# EAGLE board project_pcb (EAGLE 8.7.1)
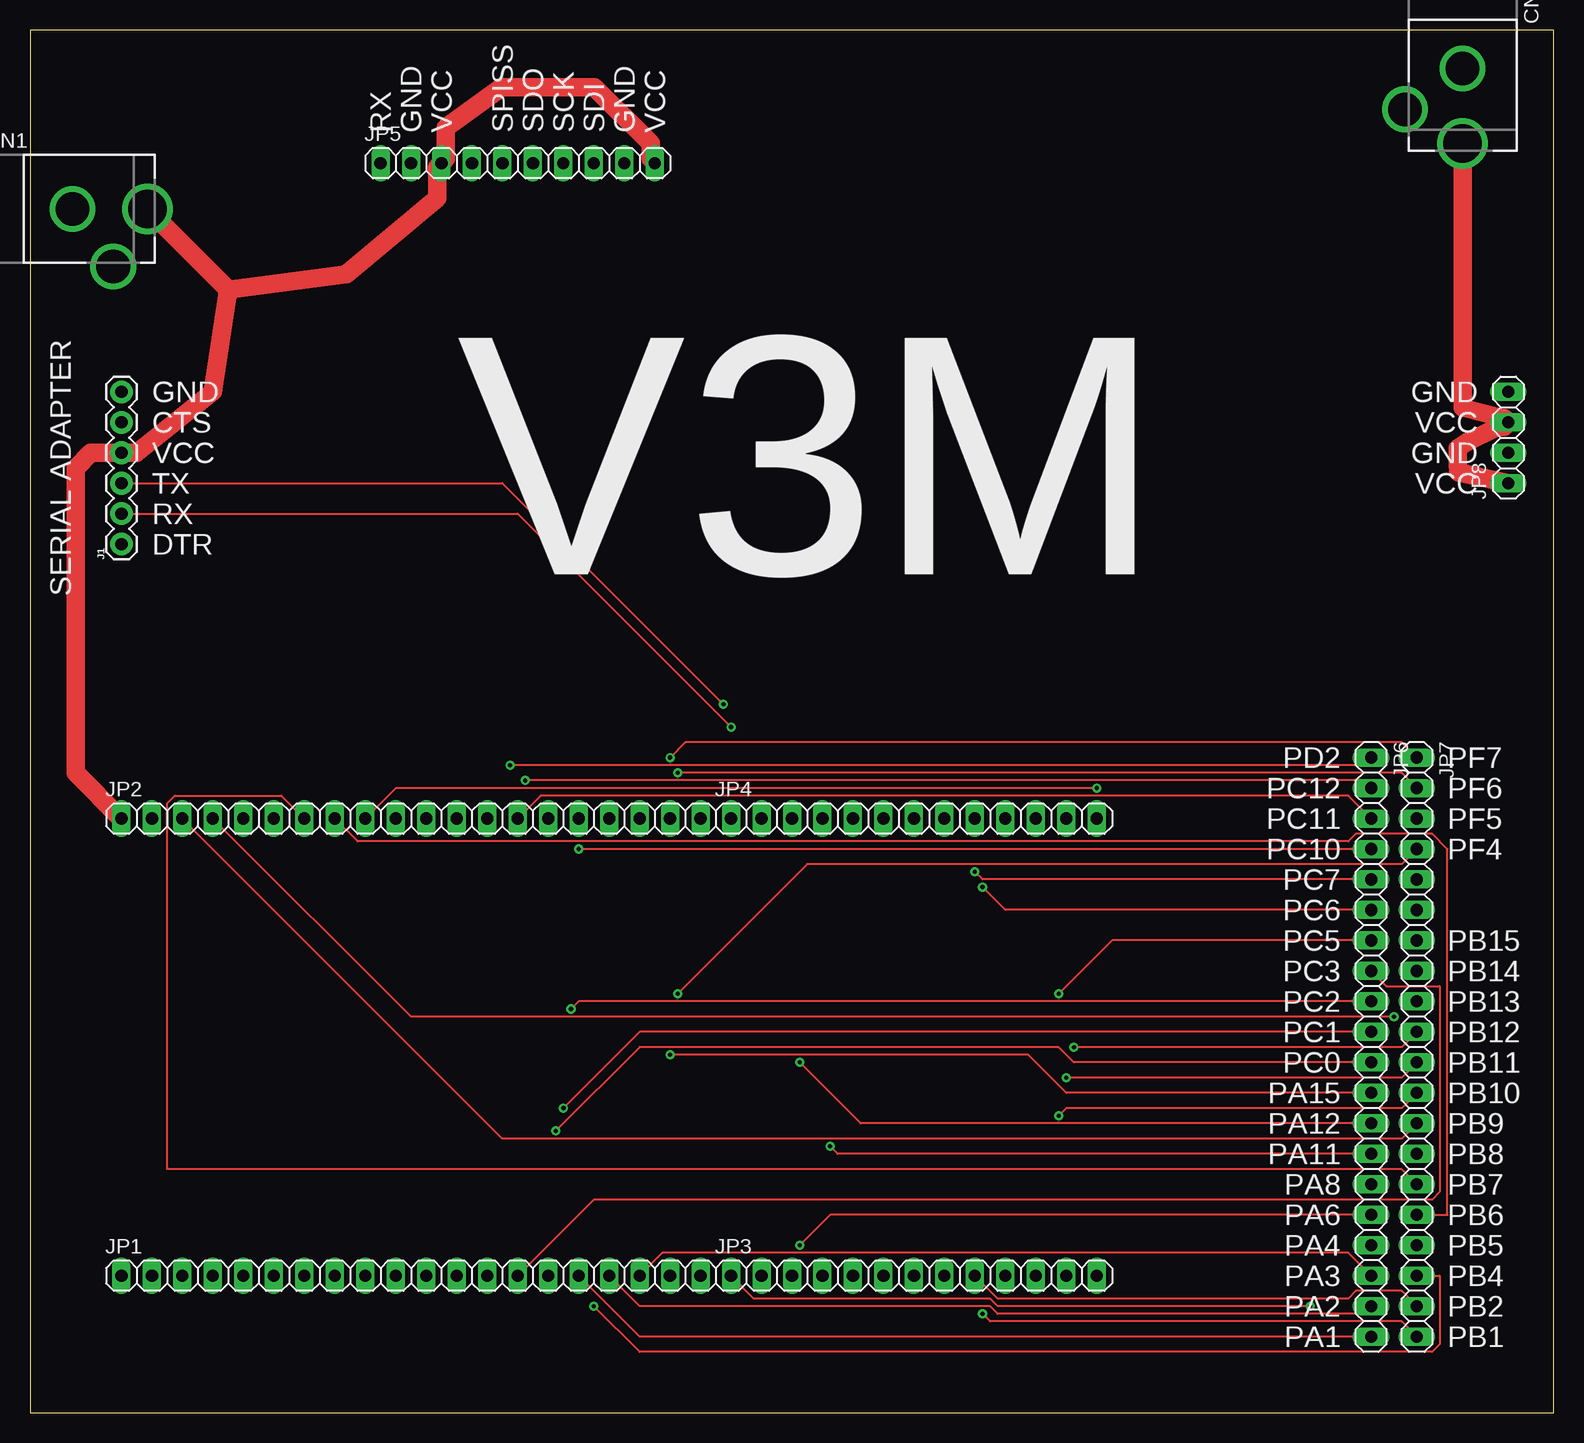
[diagram p0: board, top side]
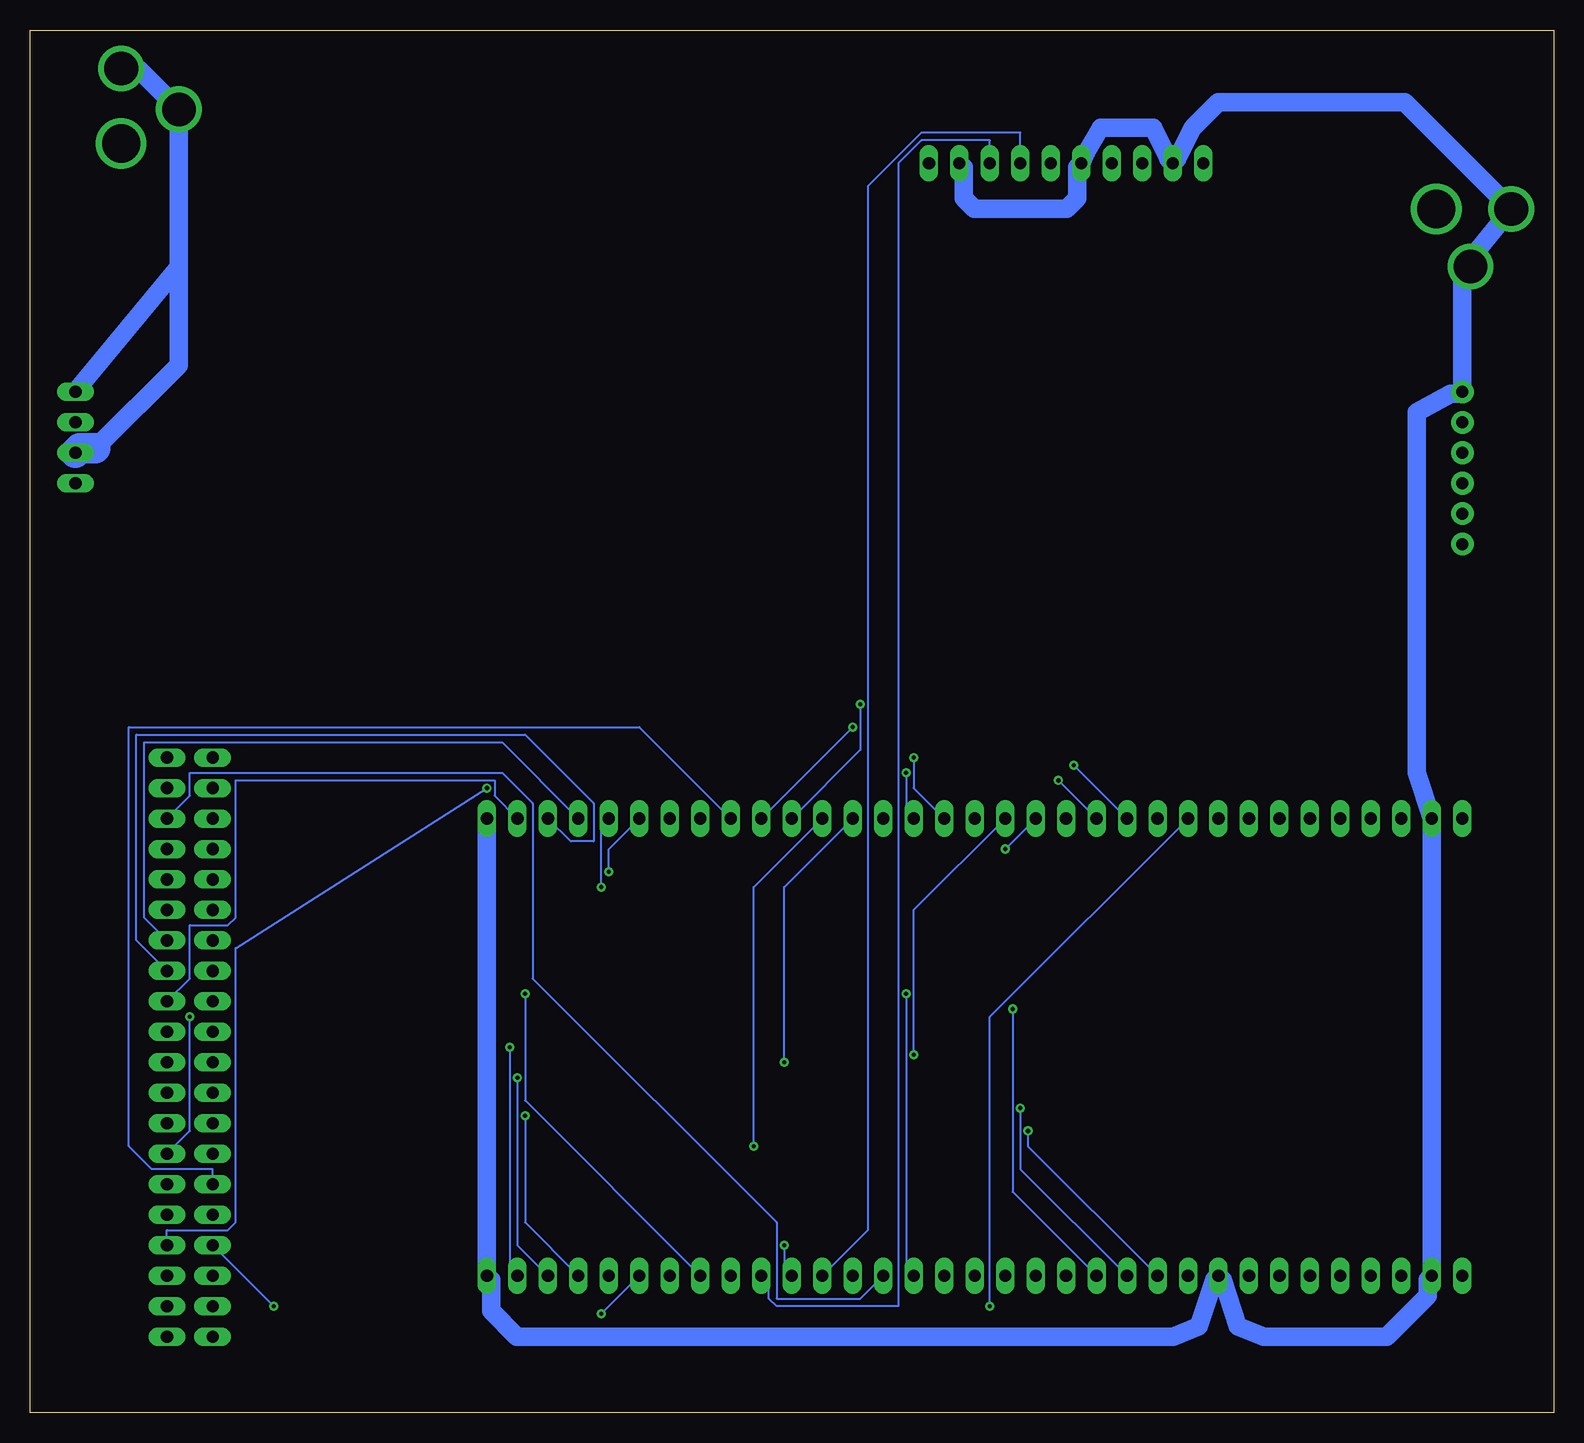
[diagram p1: board, bottom side, seen from below]

Size 126.98 x 115.24 mm. Coordinates in mm from the lower left corner, seen from the top.
Outline: 0,0 126.98,0 126.98,115.24 0,115.24 0,0
Copper layers (1*16): Top 0.035mm / dielectric 1.5mm / Bottom 0.035mm
Design rules "default": minimum track width 6mil, minimum drill 0.35mm, track to track 6mil, track to pad 6mil, pad to pad 6mil, via to via 6mil, smd to smd 6mil, copper to edge 40mil, drill to drill 6mil, minimum pad ring 10mil, minimum via ring 8mil, stop-mask expansion 4mil, vias tented up to drill 0mil, thermal gap 10mil

## Footprints (pad centres in the part's own frame; a part is rotated, then mirrored left to right if it is on the bottom)
DCJACK_2MM_PTH = drill 2.8: GND 0,7.35; GNDBREAK 4.8,10.75 | drill 3.2: PWR 0,13.6
1X06 = drill 1.016 pad 1.88: 1 0,0; 2 2.54,0; 3 5.08,0; 4 7.62,0; 5 10.16,0; 6 12.7,0
1X20 = drill 1.016 long: 1 -24.13,0; 2 -21.59,0; 3 -19.05,0; 4 -16.51,0; 5 -13.97,0; 6 -11.43,0; 7 -8.89,0; 8 -6.35,0; 9 -3.81,0; 10 -1.27,0; 11 1.27,0; 12 3.81,0; 13 6.35,0; 14 8.89,0; 15 11.43,0; 16 13.97,0; 17 16.51,0; 18 19.05,0; 19 21.59,0; 20 24.13,0
1X13 = drill 1.016 long: 1 -15.24,0; 2 -12.7,0; 3 -10.16,0; 4 -7.62,0; 5 -5.08,0; 6 -2.54,0; 7 0,0; 8 2.54,0; 9 5.08,0; 10 7.62,0; 11 10.16,0; 12 12.7,0; 13 15.24,0
1X10 = drill 1.016 long: 1 -11.43,0; 2 -8.89,0; 3 -6.35,0; 4 -3.81,0; 5 -1.27,0; 6 1.27,0; 7 3.81,0; 8 6.35,0; 9 8.89,0; 10 11.43,0
1X04 = drill 1.016 long: 1 -3.81,0; 2 -1.27,0; 3 1.27,0; 4 3.81,0

## Placement (x,y rotation side)
CN1  [DCJACK_2MM_PTH]  -3.81,100.33 270 top
CN2  [DCJACK_2MM_PTH]  119.38,119.38 180 top
J1  [1X06]  7.62,72.39 90 top
JP1  [1X20]  31.75,11.43 0 top
JP2  [1X20]  31.75,49.53 0 top
JP3  [1X13]  73.66,11.43 0 top
JP4  [1X13]  73.66,49.53 0 top
JP5  [1X10]  40.64,104.14 0 top
JP6  [1X20]  111.76,30.48 270 top
JP7  [1X20]  115.57,30.48 270 top
JP8  [1X04]  123.19,81.28 90 top

## Library data of the parts
CN1 CN2 = adafruit
J1 = SparkFun-Connectors
JP1-JP8 = pinhead

## Nets
N$1: J1.3 JP4.3
N$2: J1.2 JP4.4
N$3: CN1.PWR J1.4 JP2.1 JP5.3 JP5.10
N$4: CN1.GND CN1.GNDBREAK J1.6 JP1.2 JP1.9 JP2.2 JP3.13 JP4.13 JP5.2 JP5.5 JP5.9
N$5: JP3.2 JP5.7
N$6: JP3.4 JP5.8
N$7: JP1.16 JP6.20
N$8: JP1.17 JP6.19
N$9: JP1.18 JP6.18
N$10: JP3.1 JP6.17
N$11: JP3.3 JP6.16
N$12: JP4.5 JP6.15
N$13: JP4.2 JP6.14
N$14: JP4.1 JP6.13
N$15: JP2.16 JP6.12
N$16: JP1.11 JP6.11
N$17: JP1.12 JP6.10
N$18: JP1.13 JP6.9
N$19: JP1.14 JP6.8
N$20: JP3.6 JP6.7
N$21: JP4.9 JP6.6
N$22: JP4.8 JP6.5
N$23: JP2.15 JP6.4
N$24: JP2.14 JP6.3
N$25: JP2.13 JP6.2
N$26: JP2.10 JP7.18
N$27: JP3.8 JP7.20
N$28: JP3.9 JP7.19
N$29: JP2.9 JP7.17
N$30: JP2.8 JP7.16
N$31: JP2.7 JP7.15
N$32: JP2.4 JP7.14
N$33: JP2.3 JP7.13
N$34: JP3.10 JP7.12
N$35: JP3.11 JP7.11
N$36: JP3.12 JP7.10
N$37: JP4.12 JP7.9
N$38: JP4.11 JP7.8
N$39: JP4.10 JP7.7
N$40: JP2.18 JP7.1
N$41: JP2.19 JP7.2
N$42: JP1.20 JP7.3
N$43: JP1.19 JP7.4
N$44: JP2.12 JP6.1
N$45: CN2.GND CN2.GNDBREAK JP8.2 JP8.4
N$46: CN2.PWR JP8.1 JP8.3

## Tracks (layer width: path | path; a pad name or v marks a point on that pad's centre or on a via)
N$1  (via drill 0.35)
  Top 0.152: v57.78,59.05 39.37,77.47 J1.3
  Bottom 0.152: JP4.3 57.78,55.24 v57.78,59.05
N$2  (via drill 0.35)
  Top 0.152: v58.42,57.15 40.64,74.93 J1.2
  Bottom 0.152: v58.42,57.15 JP4.4
N$3
  Top 1.524: CN1.PWR 16.51,93.61 | 16.51,93.61 15.24,85.09 8.89,80.01 J1.4 5.08,80.01 3.81,78.74 3.81,53.34 JP2.1 | 16.51,93.61 26.34,94.88 33.93,101.2 33.93,103.78 JP5.3 34.65,104.5 34.65,107.08 39.33,110.49 47.03,110.49 51.71,105.81 51.71,104.5 JP5.10
N$4
  Bottom 1.524: JP4.13 JP3.13 88.54,11.07 88.54,8.49 86.4,6.35 31.71,6.35 29.57,7.22 28.3,11.07 JP1.9 27.58,11.07 26.31,7.22 24.17,6.35 13.93,6.35 10.52,9.76 10.52,11.07 JP1.2 JP2.2 10.16,49.57 11.41,53.36 11.41,83.37 8.6,84.91 7.8,84.91 J1.6 7.62,94.85 CN1.GNDBREAK 7.21,95.84 CN1.GND 12.43,109.22 27.94,109.22 30.07,107.09 31.39,104.55 31.39,104.54 31.39,104.5 JP5.2 32.11,104.5 32.11,104.54 33.38,107.09 37.73,107.09 38.97,105.05 39.01,105.05 JP5.5 39.73,103.78 39.73,101.2 40.6,100.33 48.3,100.33 49.17,101.2 49.17,103.78 JP5.9
N$5
  Bottom 0.152: JP3.2 57.15,15.24 57.15,102.23 52.7,106.68 44.45,106.68 JP5.7
N$6
  Bottom 0.152: JP3.4 65.41,10.79 65.41,9.53 64.77,8.89 54.61,8.89 54.61,104.14 52.7,106.05 46.99,106.05 JP5.8
N$7
  Top 0.152: JP1.16 50.8,6.35 JP6.20
N$8
  Top 0.152: JP1.17 50.8,8.89 80.01,8.89 80.64,8.26 111.12,8.26 JP6.19
N$9
  Top 0.152: JP1.18 52.7,13.34 109.86,13.34 JP6.18
N$10  (via drill 0.35)
  Top 0.152: JP3.1 60.33,9.53 80.01,9.53 80.64,8.89 v106.68,8.89
  Bottom 0.152: JP6.17 v106.68,8.89
N$11  (via drill 0.35)
  Top 0.152: v64.14,13.97 66.67,16.51 JP6.16
  Bottom 0.152: JP3.3 64.14,12.06 v64.14,13.97
N$12
  Bottom 0.152: JP4.5 76.2,57.15 118.75,57.15 118.75,22.23 116.84,20.32 111.76,20.32 JP6.15
N$13  (via drill 0.35)
  Top 0.152: v66.67,22.23 67.31,21.59 JP6.14
  Bottom 0.152: JP4.2 66.67,43.81 v66.67,22.23
N$14  (via drill 0.35)
  Top 0.152: v64.14,29.21 69.22,24.13 JP6.13
  Bottom 0.152: JP4.1 64.14,43.81 v64.14,29.21
N$15  (via drill 0.35)
  Top 0.152: v53.34,29.84 83.19,29.84 86.36,26.67 JP6.12
  Bottom 0.152: JP2.16 53.34,41.91 v53.34,29.84
N$16  (via drill 0.35)
  Top 0.152: v43.81,23.5 50.8,30.48 85.72,30.48 87,29.21 JP6.11
  Bottom 0.152: JP1.11 43.81,22.23 v43.81,23.5
N$17  (via drill 0.35)
  Top 0.152: v44.45,25.4 50.8,31.75 JP6.10
  Bottom 0.152: JP1.12 44.45,20.32 v44.45,25.4
N$18  (via drill 0.35)
  Top 0.152: v45.09,33.66 45.72,34.29 JP6.9
  Bottom 0.152: JP1.13 45.09,18.41 v45.09,33.66
N$19
  Top 0.152: JP1.14 46.99,17.78 116.84,17.78 117.47,18.41 117.47,35.56 113.03,35.56 JP6.8
N$20  (via drill 0.35)
  Top 0.152: v85.72,34.92 90.17,39.37 JP6.7
  Bottom 0.152: JP3.6 85.72,26.04 v85.72,34.92
N$21  (via drill 0.35)
  Top 0.152: v79.38,43.81 81.28,41.91 JP6.6
  Bottom 0.152: JP4.9 79.38,48.9 v79.38,43.81
N$22  (via drill 0.35)
  Top 0.152: v78.74,45.09 79.38,44.45 JP6.5
  Bottom 0.152: JP4.8 78.74,46.99 v78.74,45.09
N$23  (via drill 0.35)
  Top 0.152: JP6.4 v45.72,46.99
  Bottom 0.152: v45.72,46.99 JP2.15
N$24
  Top 0.152: JP2.14 42.55,51.44 109.86,51.44 JP6.3
N$25  (via drill 0.35)
  Top 0.152: v41.27,52.7 111.12,52.7 JP6.2
  Bottom 0.152: v41.27,52.7 JP2.13
N$26  (via drill 0.35)
  Top 0.152: v46.99,8.89 50.8,5.08 116.84,5.08 117.47,5.71 117.47,11.43 JP7.18
  Bottom 0.152: JP2.10 46.99,33.02 v46.99,8.89
N$27  (via drill 0.35)
  Top 0.152: v79.38,8.26 80.01,7.62 114.3,7.62 JP7.20
  Bottom 0.152: v79.38,8.26 JP3.8
N$28
  Top 0.152: JP3.9 80.64,9.53 109.86,9.53 110.49,10.16 114.3,10.16 JP7.19
N$29  (via drill 0.35)
  Top 0.152: JP2.9 30.48,52.07 v88.9,52.07
  Bottom 0.152: v88.9,52.07 109.86,38.73 109.86,15.88 110.49,15.24 115.57,15.24 JP7.17
N$30
  Top 0.152: JP2.8 27.3,47.62 109.86,47.62 110.49,48.26 116.84,48.26 118.11,46.99 118.11,16.51 JP7.16
N$31
  Top 0.152: JP2.7 20.95,51.44 12.06,51.44 11.43,50.8 11.43,20.32 114.3,20.32 JP7.15
N$32  (via drill 0.35)
  Top 0.152: JP2.4 31.75,33.02 v113.67,33.02
  Bottom 0.152: v113.67,33.02 113.67,23.5 JP7.14
N$33
  Top 0.152: JP2.3 39.37,22.86 114.3,22.86 JP7.13
N$34  (via drill 0.35)
  Top 0.152: v85.72,24.77 86.36,25.4 114.3,25.4 JP7.12
  Bottom 0.152: JP3.10 85.72,15.88 v85.72,24.77
N$35  (via drill 0.35)
  Top 0.152: v86.36,27.94 114.3,27.94 JP7.11
  Bottom 0.152: JP3.11 86.36,13.97 v86.36,27.94
N$36  (via drill 0.35)
  Top 0.152: v87,30.48 114.3,30.48 JP7.10
  Bottom 0.152: JP3.12 87,12.06 v87,30.48
N$37
  Bottom 0.152: JP4.12 88.27,51.44 88.27,52.7 109.86,52.7 109.86,41.27 110.49,40.64 113.67,40.64 113.67,36.2 JP7.9
N$38
  Bottom 0.152: JP4.11 81.92,47.62 80.01,47.62 80.01,50.8 85.72,56.52 118.11,56.52 118.11,39.37 JP7.8
N$39
  Bottom 0.152: JP4.10 87.63,55.88 117.47,55.88 117.47,41.27 JP7.7
N$40  (via drill 0.35)
  Top 0.152: v53.34,54.61 54.61,55.88 114.3,55.88 JP7.1
  Bottom 0.152: JP2.18 53.34,52.07 v53.34,54.61
N$41  (via drill 0.35)
  Top 0.152: v53.98,53.34 114.3,53.34 JP7.2
  Bottom 0.152: JP2.19 53.98,50.16 v53.98,53.34
N$42
  Bottom 0.152: JP1.20 57.78,9.53 64.77,9.53 64.77,15.88 85.09,36.2 85.09,50.8 87.63,53.34 113.67,53.34 113.67,51.44 JP7.3
N$43  (via drill 0.35)
  Top 0.152: v53.98,34.92 64.77,45.72 114.3,45.72 JP7.4
  Bottom 0.152: JP1.19 53.98,12.06 v53.98,34.92
N$44  (via drill 0.35)
  Top 0.152: v40.01,53.98 111.12,53.98 JP6.1
  Bottom 0.152: v40.01,53.98 JP2.12
N$45
  Bottom 1.524: CN2.GND 117.98,112.03 CN2.GNDBREAK 114.58,95.53 | 114.58,95.53 JP8.4 | 121.52,80.37 114.58,87.31 114.58,95.53
  Bottom 2.54: JP8.2 122.83,80.37 121.52,80.37
N$46
  Top 1.524: CN2.PWR 119.38,83.78 122.79,82.91 122.83,82.91 JP8.3 122.83,82.19 122.28,82.15 119.75,80.87 118.97,80.38 118.98,79.1 119.02,78.38 JP8.1

## Text on the board
tPlace: RX | GND | VCC | SPISS | SDO | SCK | SDI | GND | VCC | GND | GND | CTS | VCC | VCC | GND | SERIAL ADAPTER | TX | VCC | RX | DTR | V3M | PD2 | PF7 | PC12 | PF6 | PC11 | PF5 | PC10 | PF4 | PC7 | PC6 | PC5 | PB15 | PC3 | PB14 | PC2 | PB13 | PC1 | PB12 | PC0 | PB11 | PA15 | PB10 | PA12 | PB9 | PA11 | PB8 | PA8 | PB7 | PA6 | PB6 | PA4 | PB5 | PA3 | PB4 | PA2 | PB2 | PA1 | PB1